# EAGLE board picasso (EAGLE 7.2.0)
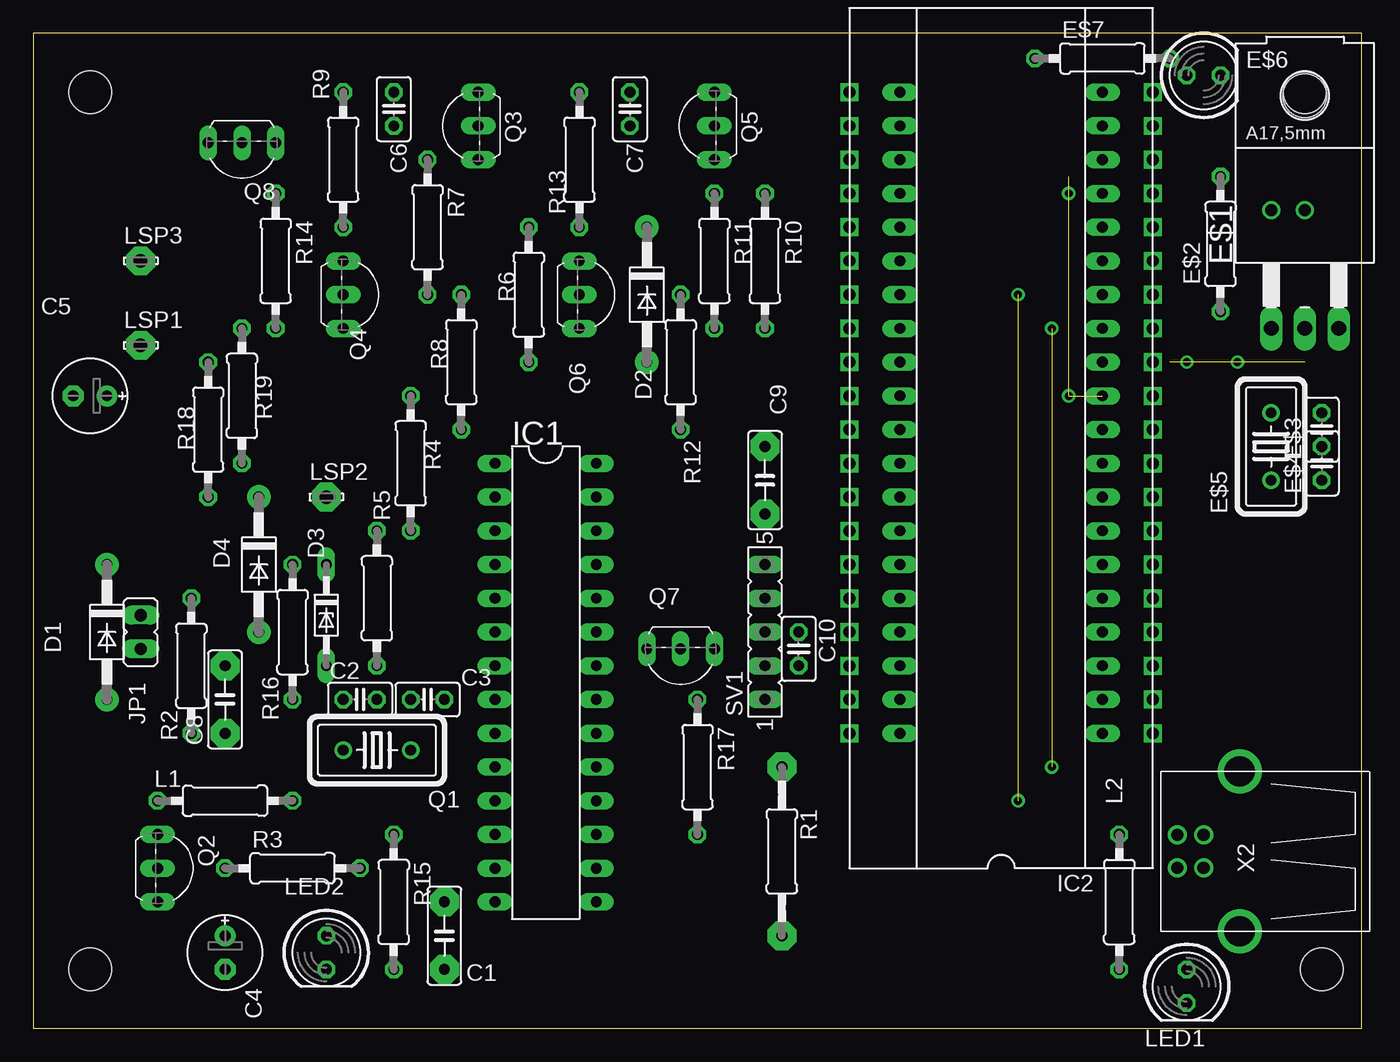
[diagram p0: board, top side]
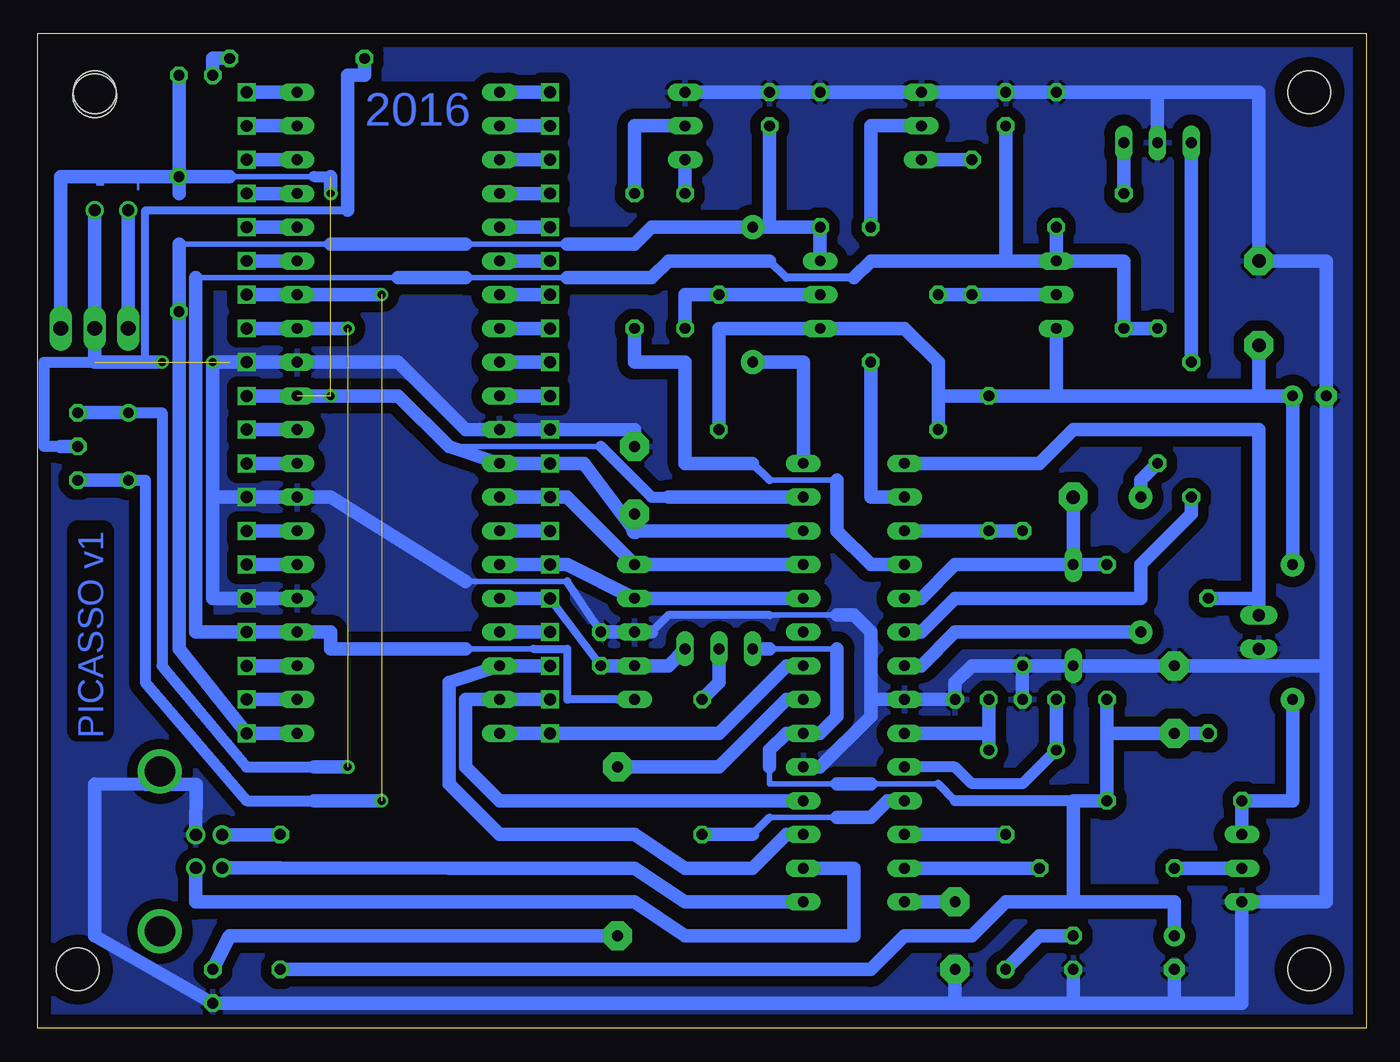
[diagram p1: board, bottom side, seen from below]

Size 100 x 74.92 mm. Coordinates in mm from the lower left corner, seen from the top.
Outline: 0,0 100,0 100,74.92 0,74.92 0,0
Copper layers (1*16): Top 0.035mm / dielectric 1.5mm / Bottom 0.035mm
Design rules "default": minimum track width 10mil, minimum drill 24mil, track to track 8mil, track to pad 8mil, pad to pad 8mil, via to via 8mil, smd to smd 8mil, copper to edge 40mil, drill to drill 8mil, minimum pad ring 10mil, minimum via ring 8mil, stop-mask expansion 4mil, vias tented up to drill 0mil, thermal gap 10mil
Holes 3.2 mm at 4.28,70.48 95.72,70.48 4.28,4.44 96.99,4.44

## Footprints (pad centres in the part's own frame; a part is rotated, then mirrored left to right if it is on the bottom)
C050-025X075 = drill 0.813 pad 2.184 octagon: 1 -2.54,0; 2 2.54,0
C025-025X050 = drill 0.813 octagon: 1 -1.27,0; 2 1.27,0
E2,5-6E = drill 0.813 pad 1.575: + -1.27,0 | drill 0.813 pad 1.575 octagon: - 1.27,0
DO41-10 = drill 0.813 pad 1.778: A 5.08,0; C -5.08,0
DO34Z7 = drill 0.813 long: A 3.81,0; C -3.81,0
SOT186L = drill 1.118 long: A1 -2.54,-6.35; A2 2.54,-6.35; C 0,-6.35 | hole 3.302: 0,11.176
0207/10 = drill 0.813 octagon: 1 -5.08,0; 2 5.08,0
HC18U-V = drill 0.813: 1 -2.54,0; 2 2.54,0
LED5MM = drill 0.813 octagon: A -1.27,0; K 1.27,0
DIL28-3 = drill 0.813 long: 1 -16.51,-3.81; 2 -13.97,-3.81; 3 -11.43,-3.81; 4 -8.89,-3.81; 5 -6.35,-3.81; 6 -3.81,-3.81; 7 -1.27,-3.81; 8 1.27,-3.81; 9 3.81,-3.81; 10 6.35,-3.81; 11 8.89,-3.81; 12 11.43,-3.81; 13 13.97,-3.81; 14 16.51,-3.81; 15 16.51,3.81; 16 13.97,3.81; 17 11.43,3.81; 18 8.89,3.81; 19 6.35,3.81; 20 3.81,3.81; 21 1.27,3.81; 22 -1.27,3.81; 23 -3.81,3.81; 24 -6.35,3.81; 25 -8.89,3.81; 26 -11.43,3.81; 27 -13.97,3.81; 28 -16.51,3.81
TEXTOOL40 = drill 0.813 long: 1 -24.13,-7.62; 2 -21.59,-7.62; 3 -19.05,-7.62; 4 -16.51,-7.62; 5 -13.97,-7.62; 6 -11.43,-7.62; 7 -8.89,-7.62; 8 -6.35,-7.62; 9 -3.81,-7.62; 10 -1.27,-7.62; 11 1.27,-7.62; 12 3.81,-7.62; 13 6.35,-7.62; 14 8.89,-7.62; 15 11.43,-7.62; 16 13.97,-7.62; 17 16.51,-7.62; 18 19.05,-7.62; 19 21.59,-7.62; 20 24.13,-7.62; 21 24.13,7.62; 22 21.59,7.62; 23 19.05,7.62; 24 16.51,7.62; 25 13.97,7.62; 26 11.43,7.62; 27 8.89,7.62; 28 6.35,7.62; 29 3.81,7.62; 30 1.27,7.62; 31 -1.27,7.62; 32 -3.81,7.62; 33 -6.35,7.62; 34 -8.89,7.62; 35 -11.43,7.62; 36 -13.97,7.62; 37 -16.51,7.62; 38 -19.05,7.62; 39 -21.59,7.62; 40 -24.13,7.62
JP1 = drill 0.914 long: 1 0,-1.27; 2 0,1.27
LSP10 = drill 1.016 pad 2.159 octagon: MP 0,0
TO92-EBC = drill 0.813 long: B 0,-1.27; C -2.54,-1.27; E 2.54,-1.27
TO92-BEC = drill 0.813 long: B 2.54,0; C -2.54,0; E 0,0
0207/12 = drill 0.813 pad 2.184 octagon: 1 -6.35,0; 2 6.35,0
FE05-1 = drill 0.813 long: 1 -5.08,0; 2 -2.54,0; 3 0,0; 4 2.54,0; 5 5.08,0
USB-B-H = drill 0.914: D+ 0,1.25; D- 1.981,1.25; GND 0,-1.25; VBUS 1.981,-1.25 | drill 2.286: P$1 -2.718,-6.02; P$2 -2.718,6.02

## Placement (x,y rotation side)
C1  220nF  [C050-025X075]  30.95,6.98 270 top
C2  22p  [C025-025X050]  24.6,24.76 0 top
C3  22p  [C025-025X050]  29.68,24.76 0 top
C4  10µF  [E2,5-6E]  14.44,5.71 270 top
C5  47µF  [E2,5-6E]  4.28,47.62 180 top
C6  1nF  [C025-025X050]  27.14,69.21 90 top
C7  1nF  [C025-025X050]  44.92,69.21 90 top
C8  100nF  [C050-025X075]  14.44,24.76 90 top
C9  100nF  [C050-025X075]  55.08,41.27 270 top
C10  100nF  [C025-025X050]  57.62,28.57 270 top
D1  BAT43  [DO41-10]  5.55,29.84 270 top
D2  BAT43  [DO41-10]  46.19,55.24 270 top
D3  BZX97-3,3  [DO34Z7]  22.06,31.11 270 top
D4  BAT43  [DO41-10]  16.98,34.92 270 top
E$1  [SOT186L]  95.72,59.05 0 top
E$2  [0207/10]  89.37,59.05 90 top
E$3  [C025-025X050]  96.99,45.08 90 top
E$4  [C025-025X050]  96.99,42.54 90 top
E$5  [HC18U-V]  93.18,43.81 90 top
E$6  [LED5MM]  88.1,71.75 0 top
E$7  [0207/10]  80.48,73.02 0 top
IC1  PIC18F2550SP  [DIL28-3]  38.57,26.03 270 top
IC2  PIC16F877A  [TEXTOOL40]  72.86,46.35 90 top
JP1  [JP1]  8.09,29.84 180 top
L1  680µH  [0207/10]  14.44,17.14 180 top
L2  10µH  [0207/10]  81.75,9.52 270 top
LED1  grün  [LED5MM]  86.83,3.17 270 top
LED2  gelb  [LED5MM]  22.06,5.71 270 top
LSP1  LSP10  [LSP10]  8.09,51.43 0 top
LSP2  LSP10  [LSP10]  22.06,40 0 top
LSP3  LSP10  [LSP10]  8.09,57.78 0 top
Q1  20 MHz  [HC18U-V]  25.87,20.95 0 top
Q2  BC338-25  [TO92-EBC]  10.63,12.06 270 top
Q3  BC338-25  [TO92-EBC]  32.22,67.94 90 top
Q4  BC328-25  [TO92-EBC]  24.6,55.24 270 top
Q5  BC338-25  [TO92-EBC]  50,67.94 90 top
Q6  BC328-25  [TO92-EBC]  42.38,55.24 270 top
Q7  BC328-25  [TO92-EBC]  48.73,27.3 180 top
Q8  BF959  [TO92-BEC]  15.71,66.67 180 top
R1  1k  [0207/12]  56.35,13.33 270 top
R2  10 k  [0207/10]  11.9,27.3 270 top
R3  10k  [0207/10]  19.52,12.06 0 top
R4  4k7  [0207/10]  28.41,42.54 90 top
R5  2k2  [0207/10]  25.87,32.38 90 top
R6  10k  [0207/10]  37.3,55.24 270 top
R7  10k  [0207/10]  29.68,60.32 270 top
R8  100k  [0207/10]  32.22,50.16 270 top
R9  10k  [0207/10]  23.33,65.4 270 top
R10  10k  [0207/10]  55.08,57.78 270 top
R11  10k  [0207/10]  51.27,57.78 270 top
R12  100k  [0207/10]  48.73,50.16 270 top
R13  10k  [0207/10]  41.11,65.4 270 top
R14  100  [0207/10]  18.25,57.78 270 top
R15  1 k  [0207/10]  27.14,9.52 90 top
R16  330  [0207/10]  19.52,29.84 270 top
R17  10k  [0207/10]  50,19.68 270 top
R18  10k  [0207/10]  13.17,45.08 270 top
R19  100  [0207/10]  15.71,47.62 90 top
SV1  ICSP  [FE05-1]  55.08,29.84 90 top
X2  USB-B-H  [USB-B-H]  88.1,13.33 180 top

## Library data of the parts
C1-C10 E$2-E$4 E$7 L1 L2 R1-R19 = rcl
D1-D4 E$1 = diode
E$5 Q1 = crystal
E$6 LED1 LED2 = led
IC1 IC2 Q8 = sprut
JP1 = jumper
LSP1-LSP3 = solpad
Q2 Q3 Q5 = transistor-npn
Q4 Q6 Q7 = transistor-pnp
SV1 = con-lsta
X2 = con-usb

## Nets
+5V: C4.+ C8.1 IC1.20 L1.1 L2.2 Q7.E R2.2 R16.2
+12V: C5.+ D1.C LSP1.MP Q4.E Q6.E R4.2 R8.2 R12.2
CLOCK_18: IC1.25 IC2.33 SV1.5
CLOCK_28_40: IC1.18 IC2.39
DATA_18: IC1.24 SV1.4
DATA_28_40: IC1.22 IC2.40
GND: C1.2 C2.2 C3.2 C4.- C5.- C6.2 C7.2 C8.2 C9.1 C10.1 D3.A IC1.8 IC1.19 IC2.5 IC2.8 IC2.12 IC2.31 JP1.2 LED1.K LED2.K LSP3.MP Q2.E Q3.E Q5.E Q8.E R5.1 R9.1 R13.1 SV1.3 X2.GND
N$1: IC1.15 X2.D-
N$2: IC1.16 X2.D+
N$3: L2.1 X2.VBUS
N$4: LED1.A R1.2
N$5: C1.1 IC1.14
N$6: C2.1 IC1.10 Q1.1
N$7: C3.1 IC1.9 Q1.2
N$8: IC1.1 JP1.1 R2.1
N$9: Q5.B R10.1
N$10: IC1.12 R15.2
N$11: IC1.17 IC2.38
N$12: LED2.A R15.1
N$13: D1.A L1.2 Q2.C
N$14: Q2.B R3.1
N$15: IC1.13 R3.2
N$16: IC1.21 R1.1
N$17: Q6.B R11.2 R12.1
N$18: IC1.3 R4.1 R5.2
N$19: Q7.B R17.1
N$20: Q5.C R11.1
N$21: Q3.B R6.1
N$22: IC1.6 R18.2
N$23: Q3.C R7.1
N$24: Q4.B R7.2 R8.1
N$25: IC1.11 R17.2
N$26: D4.A IC1.7
N$27: Q8.C R14.1
N$28: IC1.2 R6.2
N$29: IC1.4 R10.2
N$30: D2.A IC1.28
N$31: D4.C R19.1
N$32: C7.1 D2.C IC2.1 Q6.C R13.2
N$33: Q8.B R18.1
S$1: IC2.20
S$2: IC2.19
S$3: IC2.18
S$4: IC2.17
S$5: IC2.16
S$6: IC2.15
S$7: IC2.14
S$8: E$3.2 E$5.2 IC2.13
S$9: E$1.A1
S$10: IC2.10
S$11: IC2.9
S$13: IC2.6
S$14: IC2.3
S$15: IC2.2
S$16: IC2.21
S$17: IC2.22
S$18: IC2.23
S$19: IC2.24
S$20: IC2.25
S$21: IC2.26
S$22: IC2.27
S$23: IC2.28
S$24: IC2.29
S$25: IC2.30
S$26: IC2.34
S$27: IC2.37
S$28: E$4.1 E$5.1
S$29: E$6.A E$7.2
S$31: C9.2 E$1.A2 E$2.2 E$6.K IC1.26 IC1.27 IC2.11 IC2.32
S$32: SV1.1
S$34: E$1.C E$3.1 E$7.1
UREF: D3.C IC1.5 LSP2.MP R16.1
VDD_18: C10.2 IC2.36 Q7.C SV1.2
VPP_8_14_18: C6.1 IC2.4 Q4.C R9.2 R14.2 R19.2

## Tracks (layer width: path | path; a pad name or v marks a point on that pad's centre or on a via)
+5V
  Bottom 0.406: 39.84,28.57 44.92,28.57 | 32.22,18.41 37.3,18.41 | 39.84,18.41 44.92,18.41 44.92,19.68
  Bottom 0.61: 30.95,17.14 32.22,18.41
  Bottom 0.813: 22.06,17.14 30.95,17.14
  Bottom 1.016: 39.84,28.57 39.84,23.49 41.11,22.22 IC1.20 43.65,22.22 44.92,20.95 44.92,19.68 | 44.92,28.57 Q7.E | 37.3,18.41 39.84,18.41 | R2.2 C8.1 19.52,22.22 R16.2 L1.1 22.06,17.14 22.06,9.52 | 22.06,9.52 27.14,9.52 29.68,6.98 34.76,6.98 37.3,4.44 L2.2 | C4.+ 14.44,9.52 22.06,9.52
+12V
  Bottom 1.016: 23.33,47.62 R4.2 32.22,47.62 | R12.2 48.73,52.7 Q6.E 34.76,52.7 32.22,50.16 32.22,47.62 | D1.C C5.+ 8.09,47.62 | 23.33,47.62 Q4.E | 8.09,47.62 23.33,47.62 | 32.22,47.62 R8.2 | 8.09,47.62 LSP1.MP
CLOCK_18  (via drill 0.9)
  Bottom 1.016: IC1.25 SV1.5 60.16,40 v61.43,40 IC2.33
CLOCK_28_40  (via drill 0.9)
  Bottom 1.016: IC1.18 65.24,17.14 67.78,19.68 67.78,24.76 IC2.39 v61.43,24.76
DATA_18  (via drill 0.9)
  Bottom 1.016: IC1.24 SV1.4 60.16,34.92 v61.43,34.92 63.97,34.92
DATA_28_40
  Bottom 1.016: IC1.22 43.65,27.3 48.73,22.22 53.81,22.22 IC2.40
GND  (via drill 0.6, 0.9)
  Bottom 0.406: 60.16,33.65 67.78,33.65 | 39.84,31.11 44.92,31.11
  Bottom 0.61: C10.1 60.16,33.65 | 53.81,29.84 52.54,31.11 44.92,31.11
  Bottom 1.016: Q5.E C7.2 R13.1 Q3.E C6.2 R9.1 15.71,70.48 | C10.1 SV1.3 53.81,29.84 | 67.78,33.65 77.94,40 IC2.8 v84.29,40 86.83,40 | 86.83,40 v86.83,50.16 v84.29,50.16 IC2.12 72.86,50.16 67.78,45.08 IC2.31 v61.43,45.08 55.08,45.08 C9.1 | 37.3,24.76 IC1.8 C3.2 30.95,26.03 29.68,27.3 D3.A | 37.3,24.76 37.3,29.84 38.57,31.11 39.84,31.11 | IC1.19 41.11,19.68 37.3,23.49 37.3,24.76 | 8.09,27.3 JP1.2 | 22.06,1.9 30.95,1.9 | 14.44,1.9 9.36,1.9 Q2.E 3.01,9.52 3.01,27.3 | 14.44,1.9 22.06,1.9 | 22.06,1.9 LED2.K | 3.01,27.3 C5.- 3.01,57.78 LSP3.MP 8.09,70.48 15.71,70.48 | 8.09,27.3 C8.2 D3.A | 3.01,27.3 8.09,27.3 | IC2.5 v84.29,32.38 86.83,32.38 86.83,40 | 14.44,1.9 C4.- | 88.08,18.39 X2.GND | 95.72,18.41 88.08,18.39 | 88.08,18.39 91.89,18.39 95.72,18.41 | 95.72,18.41 95.72,6.98 LED1.K 30.95,1.9 | 30.95,1.9 C1.2 | D3.A R5.1 C2.2 | Q8.E 15.71,70.48
  pour Bottom (isolate 0.813): -0.8,75.56 100.8,75.56 100.8,-0.64 -0.8,-0.64
N$1
  Bottom 1.016: X2.D- 81.77,12.08 69.05,12.06 55.08,12.06 51.27,9.52 IC1.15
N$2
  Bottom 0.406: 88.1,12.06 X2.D+
  Bottom 1.016: IC1.16 38.57,12.06 38.57,6.98 51.27,6.98 55.08,9.52 88.1,9.52 88.1,12.06
N$3
  Bottom 0.406: 81.75,14.58 L2.1
  Bottom 1.016: 81.75,14.58 X2.VBUS
N$4
  Bottom 1.016: R1.2 85.56,6.98 LED1.A
N$5
  Bottom 1.016: C1.1 IC1.14
N$6
  Bottom 0.813: IC1.10 30.95,19.68 29.68,18.41 25.87,18.41 Q1.1
  Bottom 1.016: Q1.1 C2.1
N$7
  Bottom 1.016: Q1.2 28.41,22.22 | 28.41,22.22 IC1.9 | 28.41,22.22 C3.1
N$8
  Bottom 1.016: 8.09,32.38 8.09,45.08 22.06,45.08 24.6,42.54 IC1.1 | JP1.1 8.09,32.38 | 8.09,32.38 R2.1
N$9
  Bottom 1.016: Q5.B 55.08,67.94 R10.1
N$10
  Bottom 1.016: R15.2 IC1.12
N$11  (via drill 0.9)
  Bottom 1.016: IC1.17 43.65,14.6 46.19,12.06 51.27,12.06 55.08,14.6 65.24,14.6 69.05,18.41 69.05,26.03 IC2.38 v61.43,27.3
N$12
  Bottom 1.016: LED2.A 24.6,6.98 R15.1
N$13
  Bottom 1.016: Q2.C L1.2 5.55,17.14 D1.A
N$14
  Bottom 1.016: Q2.B R3.1
N$15
  Bottom 1.016: R3.2 IC1.13
N$16
  Bottom 1.016: IC1.21 43.65,24.76 48.73,19.68 R1.1
N$17
  Bottom 1.016: R11.2 51.27,55.24 R12.1 Q6.B
N$18
  Bottom 1.016: IC1.3 R4.1 R5.2
N$19
  Bottom 1.016: R17.1 48.73,26.03 Q7.B
N$20
  Bottom 1.016: R11.1 Q5.C
N$21
  Bottom 1.016: Q3.B 37.3,67.94 R6.1
N$22
  Bottom 1.016: IC1.6 33.49,29.84 30.95,32.38 16.98,32.38 16.98,34.92 13.17,38.73 R18.2
N$23
  Bottom 1.016: R7.1 Q3.C
N$24
  Bottom 1.016: Q4.B R8.1 R7.2
N$25
  Bottom 0.406: 39.84,15.87 44.92,15.87
  Bottom 0.61: 44.92,15.87 46.19,14.6
  Bottom 1.016: IC1.11 36.03,17.14 37.3,15.87 39.84,15.87 | 46.19,14.6 R17.2
N$26
  Bottom 1.016: IC1.7 33.49,27.3 30.95,29.84 D4.A
N$27
  Bottom 1.016: Q8.C R14.1
N$28
  Bottom 1.016: IC1.2 37.3,40 R6.2
N$29
  Bottom 0.406: 39.84,41.27 44.92,41.27
  Bottom 0.61: 44.92,41.27 46.19,42.54
  Bottom 1.016: R10.2 55.08,50.16 51.27,50.16 51.27,42.54 46.19,42.54 | 39.84,41.27 39.84,37.46 37.3,34.92 IC1.4
N$30
  Bottom 1.016: D2.A 42.38,50.16 IC1.28
N$31
  Bottom 1.016: D4.C 16.98,41.27 R19.1
N$32  (via drill 0.9)
  Bottom 0.406: 44.92,60.32 D2.C | 89.37,59.05 77.94,59.05 | 67.78,59.05 60.16,59.05
  Bottom 1.016: 44.92,60.32 C7.1 | Q6.C R13.2 44.92,60.32 | IC2.1 v84.29,22.22 89.37,28.57 89.37,59.05 | 77.94,59.05 67.78,59.05 | 60.16,59.05 55.08,59.05 53.81,60.32 44.92,60.32
N$33
  Bottom 1.016: Q8.B R18.1
S$1  (via drill 0.9)
  Bottom 1.016: IC2.20 v84.29,70.48
S$2  (via drill 0.9)
  Bottom 1.016: IC2.19 v84.29,67.94
S$3  (via drill 0.9)
  Bottom 1.016: IC2.18 v84.29,65.4
S$4  (via drill 0.9)
  Bottom 1.016: IC2.17 v84.29,62.86
S$5  (via drill 0.9)
  Bottom 1.016: IC2.16 v84.29,60.32
S$6  (via drill 0.9)
  Bottom 1.016: IC2.15 v84.29,57.78
S$7  (via drill 0.6, 0.9)  (1 unrouted)
  Bottom 0.813: 91.91,26.03 84.29,17.14 79.21,17.14 77.94,17.14
  Bottom 1.016: v84.29,55.24 IC2.14 v74.13,55.24 | 79.21,17.14 v74.13,17.14
S$8  (via drill 0.6, 0.9)  (1 unrouted)
  Bottom 0.813: E$5.2 90.64,46.35 90.64,27.3 84.29,19.68 79.21,19.68
  Bottom 1.016: v84.29,52.7 IC2.13 v76.67,52.7 | E$3.2 E$5.2 | 79.21,19.68 v76.67,19.68
S$9  (via drill 0.9)
  Bottom 1.016: E$1.A1 v93.18,61.59
S$10  (via drill 0.9)
  Bottom 1.016: IC2.10 v84.29,45.08
S$11  (via drill 0.9)
  Bottom 1.016: IC2.9 v84.29,42.54
S$12  (via drill 0.9)
  Bottom 1.016: 81.75,37.46 v84.29,37.46
S$13  (via drill 0.9)
  Bottom 1.016: IC2.6 v84.29,34.92
S$14  (via drill 0.9)
  Bottom 1.016: IC2.3 v84.29,27.3
S$15  (via drill 0.9)
  Bottom 1.016: IC2.2 v84.29,24.76
S$16  (via drill 0.9)
  Bottom 1.016: IC2.21 v61.43,70.48
S$17  (via drill 0.9)
  Bottom 1.016: IC2.22 v61.43,67.94
S$18  (via drill 0.9)
  Bottom 1.016: IC2.23 v61.43,65.4
S$19  (via drill 0.9)
  Bottom 1.016: IC2.24 v61.43,62.86
S$20  (via drill 0.9)
  Bottom 1.016: IC2.25 v61.43,60.32
S$21  (via drill 0.9)
  Bottom 1.016: IC2.26 v61.43,57.78
S$22  (via drill 0.9)
  Bottom 1.016: IC2.27 v61.43,55.24
S$23  (via drill 0.9)
  Bottom 1.016: IC2.28 v61.43,52.7
S$24  (via drill 0.9)
  Bottom 1.016: IC2.29 v61.43,50.16
S$25  (via drill 0.9)
  Bottom 1.016: IC2.30 v61.43,47.62
S$26  (via drill 0.9)
  Bottom 1.016: IC2.34 v61.43,37.46
S$27  (via drill 0.9)
  Bottom 1.016: IC2.37 v61.43,29.84
S$28
  Bottom 0.813: E$5.1 91.91,41.27 91.91,26.03
  Bottom 1.016: E$4.1 E$5.1
S$29
  Bottom 1.016: E$7.2 86.83,73.02 E$6.A
S$30  (via drill 0.9)
  other vias: 61.43,22.22
S$31  (via drill 0.6, 0.9)  (2 unrouted)
  Bottom 0.406: 57.62,43.81 69.05,43.81 | 85.56,64.13 79.21,64.13
  Bottom 0.813: 52.54,40 53.81,40 57.62,43.81 | 79.21,64.13 77.94,64.13
  Bottom 1.016: IC1.27 52.54,40 | v84.29,47.62 IC2.11 v77.94,47.62 72.86,47.62 69.05,43.81 IC2.32 v61.43,42.54 58.89,42.54 55.08,37.46 IC1.26 | E$1.A2 98.26,64.13 E$2.2 | E$2.2 89.37,62.86 | E$2.2 85.56,64.13 | v77.94,62.86 77.94,64.13 | E$2.2 E$6.K
  Bottom 1.27: 55.08,37.46 C9.2
S$32
  Bottom 0.406: 67.78,28.57 62.7,28.57
  Bottom 0.61: 62.7,28.57 60.16,28.57 60.16,24.76 SV1.1 56.35,24.76
  Bottom 1.016: 79.21,29.84 77.94,29.84 77.94,28.57 67.78,28.57
S$34  (via drill 0.6, 0.9)  (1 unrouted)
  Bottom 0.61: 91.91,50.16 91.91,61.59 76.67,61.59
  Bottom 0.813: E$3.1 99.53,43.81 99.53,50.16 95.72,50.16
  Bottom 1.016: 98.26,43.81 E$3.1 | v95.72,61.59 E$1.C 95.72,50.16 91.91,50.16 v90.64,50.16 | 76.67,61.59 76.67,71.75 75.4,71.75 E$7.1
UREF
  Bottom 1.016: D3.C R16.1 D3.C | IC1.5 33.49,32.38 30.95,34.92 D3.C | D3.C LSP2.MP
VDD_18  (via drill 0.9)
  Bottom 0.61: v61.43,32.38 C10.2
  Bottom 1.016: C10.2 SV1.2 52.54,27.3 Q7.C | v61.43,32.38 IC2.36
VPP_8_14_18  (via drill 0.9)
  Bottom 0.406: 60.16,56.51 67.78,56.51 | 72.86,56.51 88.1,56.51
  Bottom 0.61: 38.57,56.51 43.65,56.51 44.92,57.78
  Bottom 1.016: 27.14,57.78 C6.1 | Q4.C R9.2 | Q4.C 18.25,57.78 R14.2 R19.2 | Q4.C 27.14,57.78 | 27.14,57.78 37.3,57.78 38.57,56.51 | 44.92,57.78 52.54,57.78 53.81,56.51 60.16,56.51 | 67.78,56.51 72.86,56.51 | 88.1,56.51 88.1,29.84 v84.29,29.84 IC2.4

## Text on the board
Bottom: 2016 | + | - | PICASSO v1